# Altium PCB cinch_stereo_ingang.PcbDoc
Units mm, origin at the board's own origin, x right, y up, seen from the top; angles counter-clockwise.
Board outline 65.96 x 77 mm, 2 copper layers (Top Layer, Bottom Layer); 60 components, 162 nets, 148 pads, 8 vias.
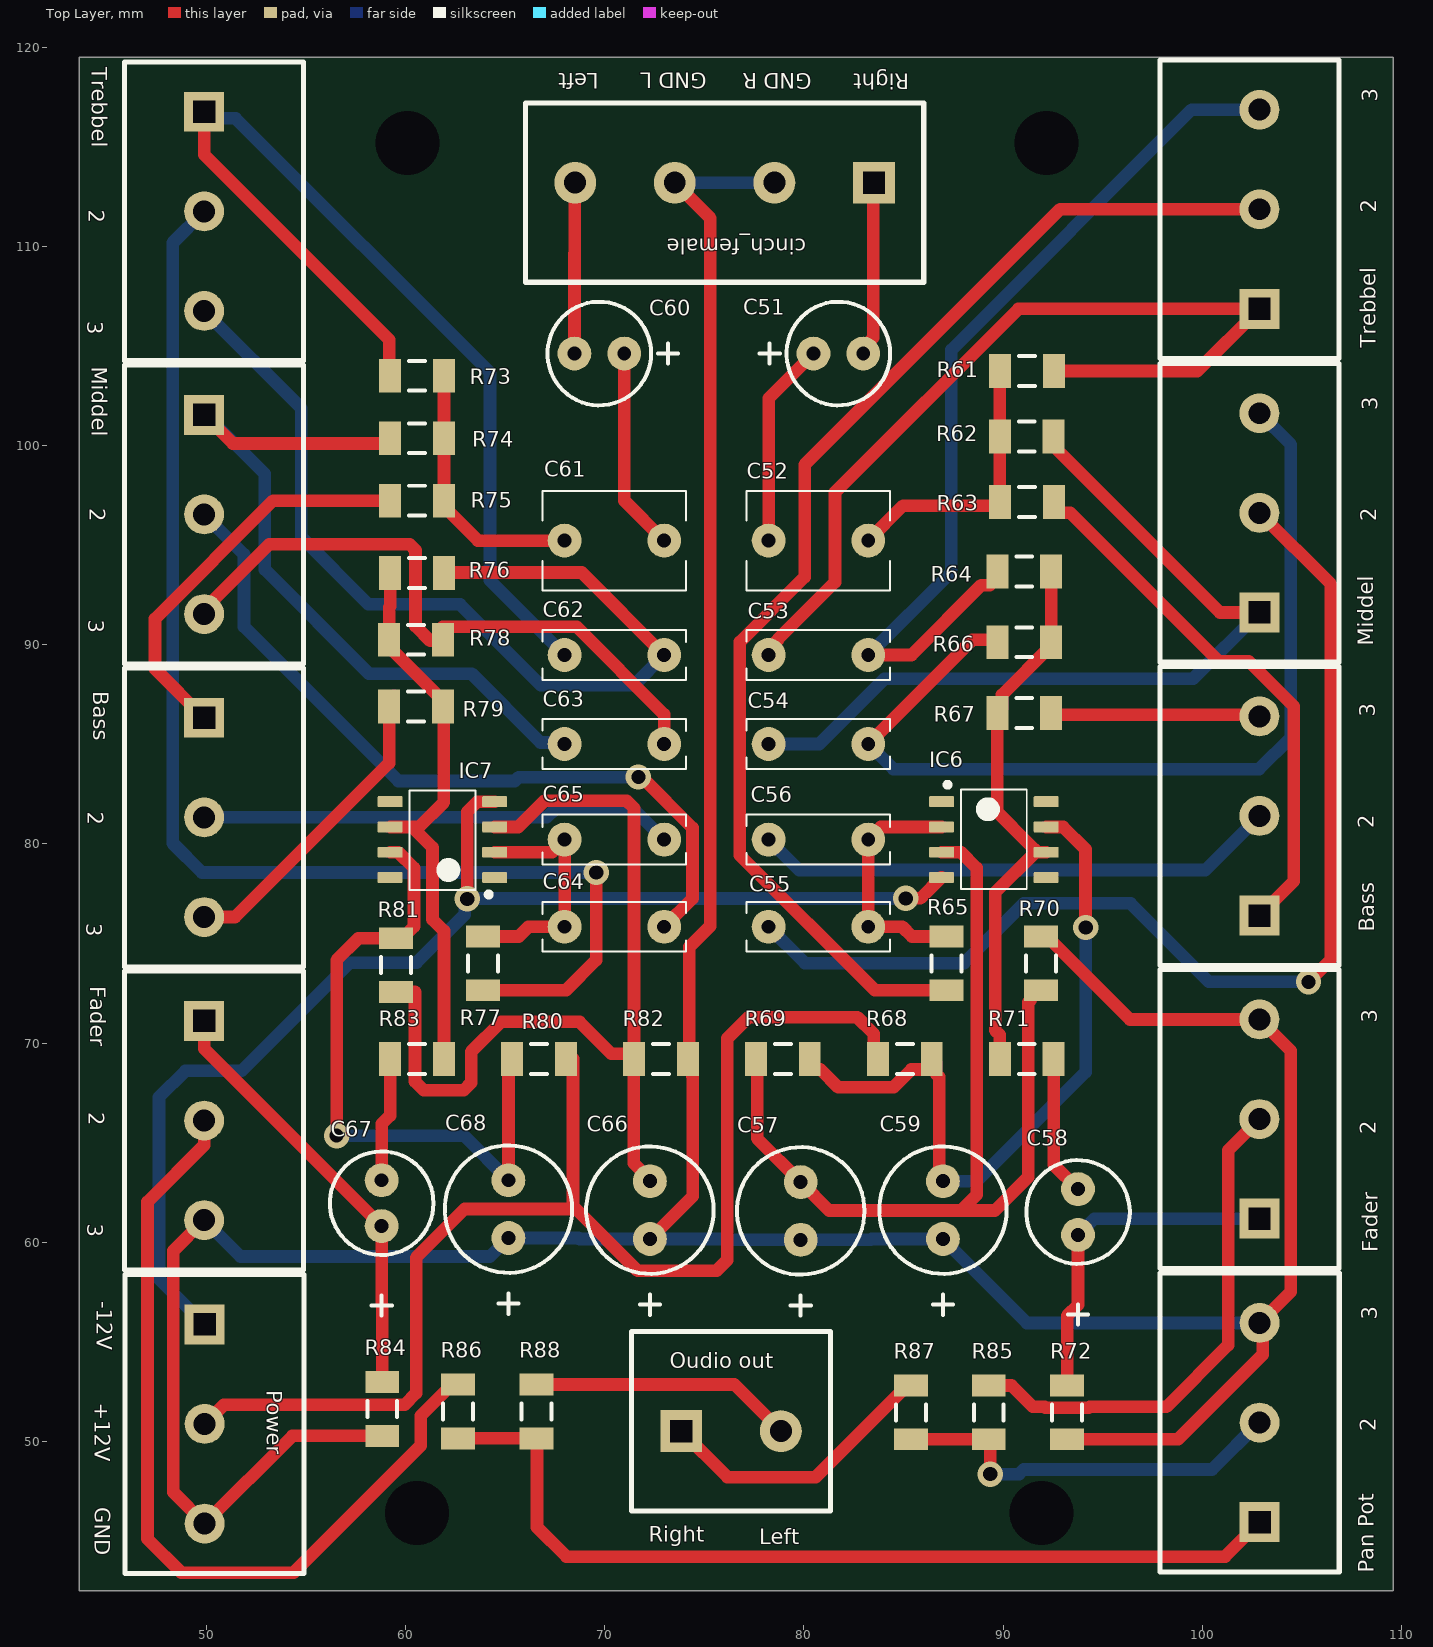
[diagram p0: Top Layer view]
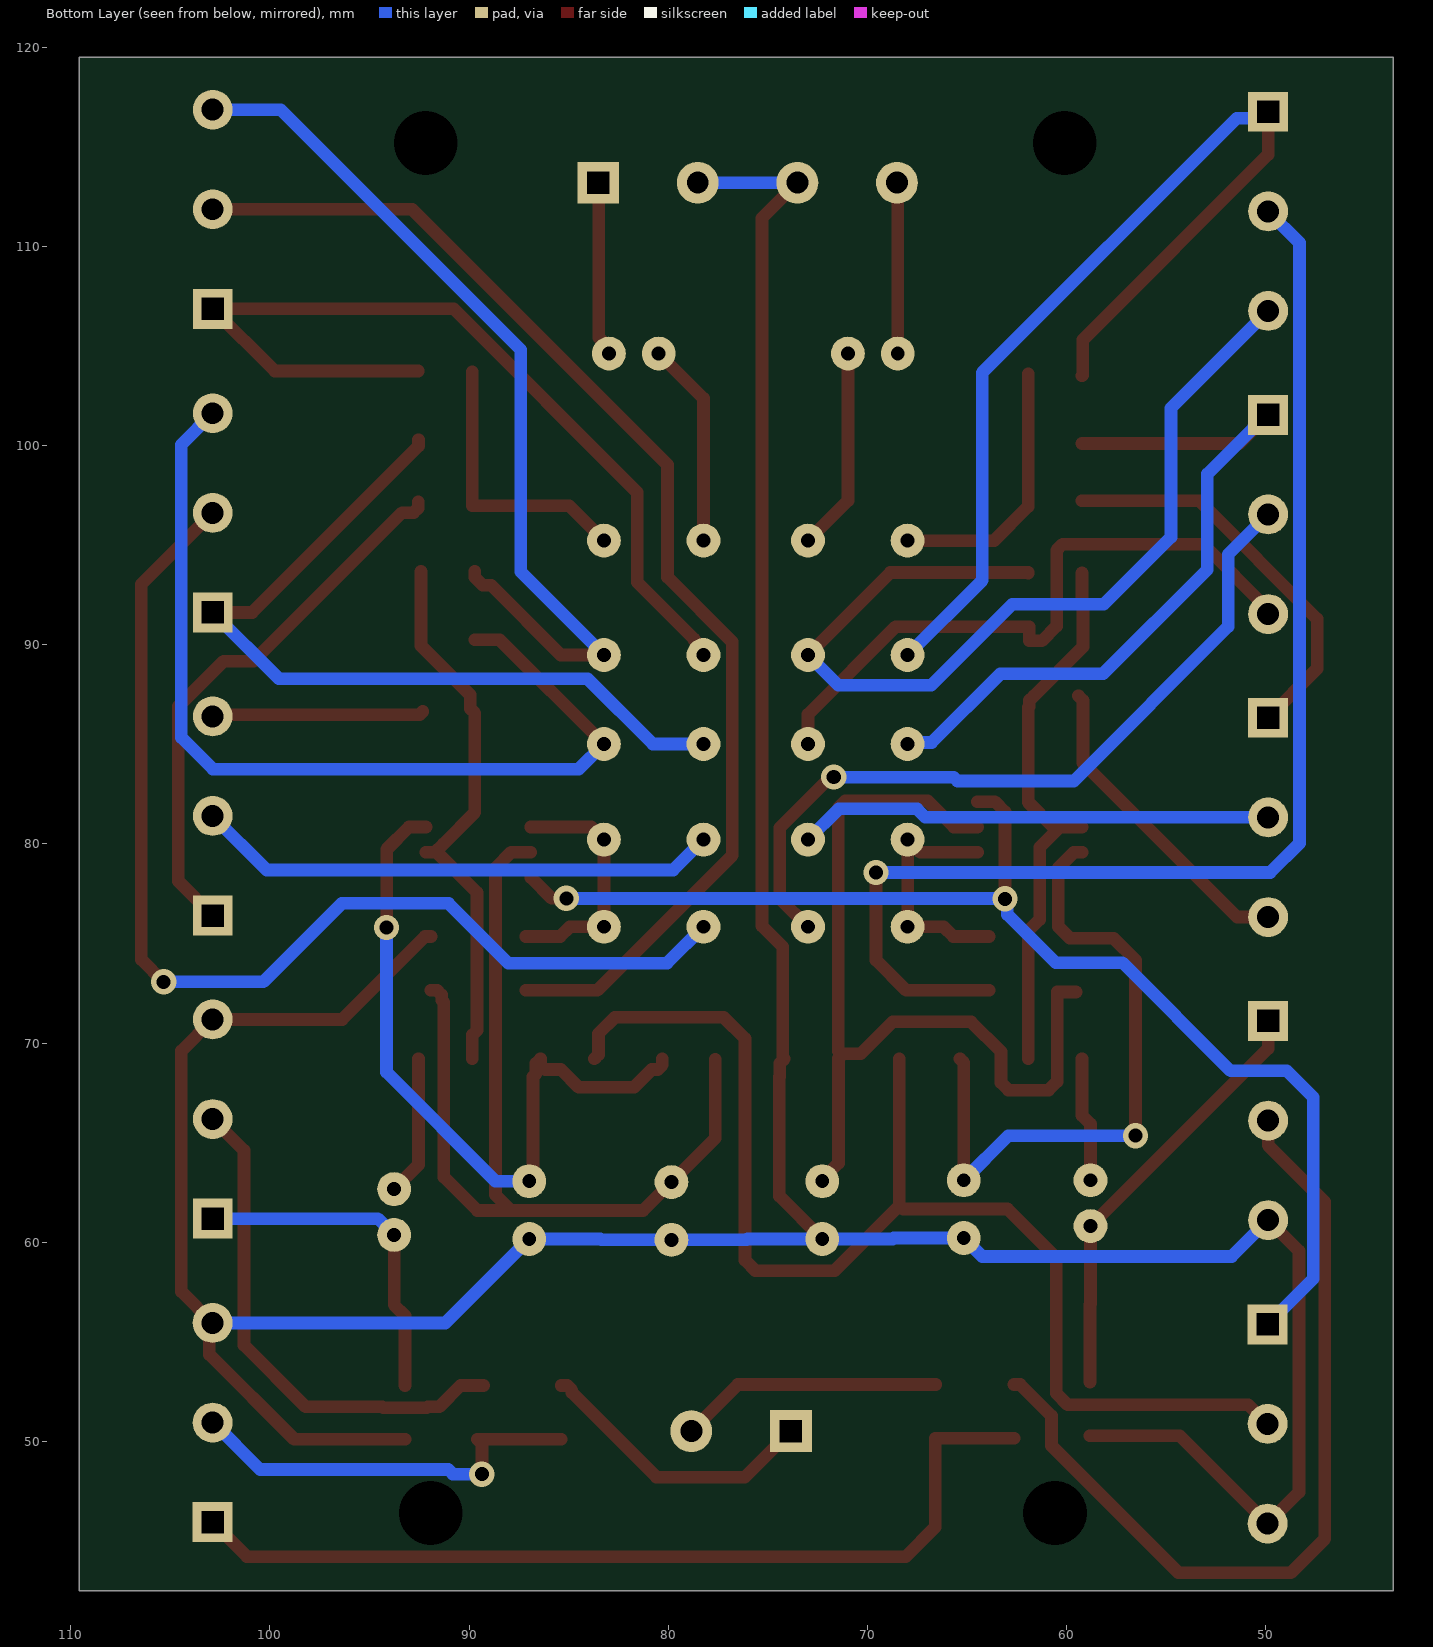
[diagram p1: Bottom Layer view, seen from below]

## Layer stack, top to bottom
Top Solder: solder mask 0.0102, Solder Resist, Dk 3.5
Top Layer: signal copper 0.0356
Dielectric 1: dielectric 0.32, FR-4, Dk 4.8
Bottom Layer: signal copper 0.0356
Bottom Solder: solder mask 0.0102, Solder Resist, Dk 3.5

## Board outline
43.612,42.5 109.576,42.5 109.576,119.5 43.612,119.5

## Design rules (kind name [scope] priority, off if disabled: settings)
Clearance [All] p1: gap=0.254 ignorepadtopadclearanceinfootprint=FALSE except(0: Arc-Hole Track-Hole SMDPad-Hole THPad-Hole Via-Hole Fill-Hole Poly-Hole Region-Hole Text-Hole)
HoleSize [All] p1: absolutevalues=TRUE maxlimit=5.08 minlimit=0.025 maxpercent=80.000 minpercent=20.000
PolygonConnect [All] p1: connectstyle=Relief reliefconductorwidth=0.254 reliefentries=4 polygonreliefangle="90 Angle" airgapwidth=0.254
RoutingVias [All] p1: holewidth=0.711 width=1.27 viastyle="Through Hole" minholewidth=0.711 minwidth=1.27 maxholewidth=0.711 maxwidth=1.27
SolderMaskExpansion [All] p1: expansion=0.102 istentingtop=FALSE
Width [All] p1: maxlimit=1.27 minlimit=0.254 preferedwidth=0.635 minimp=50.000000 maximp=50.000000 favimp=50.000000
29 further rules are at their usual default settings.

## Classes and differential pairs
component class cinch_stereo_ingang: Bass C51 C52 C53 C54 C55 C56 C57 C58 C59 C60 C61 C62 C63 C64 C65 C66 C67 C68 cinch_female Fader IC6 IC7 Middel "Oudio out" "Pan Pot" Power R61 R62 R63 R64 R65 R66 R67 R68 R69 R70 R71 R72 R73 R74 R75 R76 R77 R78 R79 R80 R81 R82 R83 R84 R85 R86 R87 R88 Trebbel

## Components (designator, comment, footprint, x,y, rotation, side; value= is the part's Value field where it differs from the comment)
Bass "RPot" HEADER_3 49.886,86.331 r270 top value=470K (schematic designator P2_3B)
Bass "RPot" HEADER_3 102.87,76.403 r90 top value=470K (schematic designator P2_3A)
C51 "Cap Pol2" "CAPACITOR 10UF" 82.979,104.619 r180 top value=10uF
C52 "Cap" "CAPACITOR 1UF" 78.229,95.229 r0 top value=1uF
C53 "Cap" "CAPACITOR 22NF, 47NF, 100NF" 78.229,89.486 r0 top value=47nF
C54 "Cap" "CAPACITOR 22NF, 47NF, 100NF" 78.229,85.018 r0 top value=4n7F
C55 "Cap" "CAPACITOR 22NF, 47NF, 100NF" 78.229,75.842 r0 top value=22nF
C56 "Cap" "CAPACITOR 22NF, 47NF, 100NF" 78.229,80.217 r0 top value=4n7F
C57 "Cap Pol2" "CAPACITOR 100UF" 79.839,63.024 r270 top value=100uF
C58 "Cap Pol2" "CAPACITOR 4U7F" 93.76,62.671 r270 top value=4u7F
C59 "Cap Pol2" "CAPACITOR 100UF" 86.978,63.067 r270 top value=100uF
C60 "Cap Pol2" "CAPACITOR 10UF" 68.478,104.619 r0 top value=10uF
C61 "Cap" "CAPACITOR 1UF" 72.984,95.229 r180 top value=1uF
C62 "Cap" "CAPACITOR 22NF, 47NF, 100NF" 67.984,89.486 r0 top value=47nF
C63 "Cap" "CAPACITOR 22NF, 47NF, 100NF" 67.984,85.018 r0 top value=4n7F
C64 "Cap" "CAPACITOR 22NF, 47NF, 100NF" 72.984,75.842 r180 top value=22nF
C65 "Cap" "CAPACITOR 22NF, 47NF, 100NF" 72.984,80.217 r180 top value=4n7F
C66 "Cap Pol2" "CAPACITOR 100UF" 72.267,63.067 r270 top value=100uF
C67 "Cap Pol2" "CAPACITOR 4U7F" 58.8,63.115 r270 top value=4u7F
C68 "Cap Pol2" "CAPACITOR 100UF" 65.165,63.115 r270 top value=100uF
cinch_female "cinch_female" HEADER_4 83.516,113.197 r180 top
Fader "RPot" HEADER_3 49.886,71.112 r270 top value=470K (schematic designator P2_4B)
Fader "RPot" HEADER_3 102.87,61.189 r90 top value=470K (schematic designator P2_4A)
IC6 "TL061CD" OPAMP_TL061 89.535,80.217 r0 top
IC7 "TL061CD" OPAMP_TL061 61.849,80.217 r180 top
Middel "RPot" HEADER_3 49.886,101.542 r270 top value=100K (schematic designator P2_2B)
Middel "RPot" HEADER_3 102.87,91.622 r90 top value=100K (schematic designator P2_2A)
"Oudio out" "Header 2" HEADER_2 73.842,50.521 r0 top (schematic designator "PIN 17")
"Pan Pot" "RPot" HEADER_3 102.875,45.95 r90 top value=10K (schematic designator P4)
Power "Header 3" HEADER_3 49.911,55.88 r270 top (schematic designator "PIN 16")
R61 "Res2" C1206 91.201,103.74 r0 top value=12k
R62 "Res2" C1206 91.186,100.452 r0 top value=3k9
R63 "Res2" C1206 91.201,97.164 r0 top value=1k8
R64 "Res2" C1206 91.059,93.679 r0 top value=12k
R65 "Res2" C1206 87.16,74.002 r90 top value=12k
R66 "Res2" C1206 91.059,90.123 r0 top value=3k9
R67 "Res2" C1206 91.059,86.567 r180 top value=1K8
R68 "Res2" C1206 85.065,69.207 r180 top value=220
R69 "Res2" C1206 78.943,69.207 r0 top value=22k
R70 "Res2" C1206 91.91,74.002 r270 top value=22k
R71 "Res2" C1206 91.186,69.207 r0 top value=560
R72 "Res2" C1206 93.215,51.461 r90 top value=100
R73 "Res2" C1206 60.579,103.505 r180 top value=12k
R74 "Res2" C1206 60.579,100.368 r180 top value=3k9
R75 "Res2" C1206 60.579,97.231 r180 top value=1k8
R76 "Res2" C1206 60.579,93.6 r180 top value=12k
R77 "Res2" C1206 63.894,74.002 r90 top value=12k
R78 "Res2" C1206 60.524,90.25 r180 top value=3k9
R79 "Res2" C1206 60.524,86.9 r0 top value=1K8
R80 "Res2" C1206 66.7,69.207 r0 top value=220
R81 "Res2" C1206 59.529,73.914 r90 top value=22k
R82 "Res2" C1206 72.822,69.207 r180 top value=22k
R83 "Res2" C1206 60.579,69.207 r180 top value=560
R84 "Res2" C1206 58.829,51.635 r90 top value=100
R85 "Res2" C1206 89.278,51.461 r270 top value=4k7
R86 "Res2" C1206 62.639,51.508 r270 top value=4k7
R87 "Res2" C1206 85.369,51.461 r90 top value=10K
R88 "Res2" C1206 66.576,51.508 r90 top value=10K
Trebbel "RPot" HEADER_3 49.886,116.756 r270 top value=100K (schematic designator P2_1B)
Trebbel "RPot" HEADER_3 102.87,106.862 r90 top value=100K (schematic designator P2_1A)

## Footprints (in the part's own frame and the unit in brackets; to place one, negate y for a bottom-side part, rotate by r counter-clockwise, add the part's x,y. Pads: shape width x height; smd on the part's side, far side on the other; paste and mask are expansions set on the pad)
C1206 [mm] "Chip Capacitor, Body 3.2x1.6mm, IPC High Density"
  rect 1.1x1.7 smd: 1(-1.35,0) 2(1.35,0)
  silkscreen extent -0.4,-0.75 0.4,0.75, body extent -1.7,-0.9 1.7,0.9, height 1.3
"CAPACITOR 1UF" [mm]
  round 1.7 hole 0.7: 1(0,0) 2(5,0)
  silkscreen extent -1.1,-2.5 6.1,2.5
"CAPACITOR 4U7F" [mm]
  round 1.7 hole 0.7: 1(0,0) 2(2.3,0)
  silkscreen extent -1.45,-2.6 6.8,2.6
"CAPACITOR 10UF" [mm]
  round 1.7 hole 0.7: 1(0,0) 2(2.5,0)
  silkscreen extent -1.35,-2.6 5.21,2.6
"CAPACITOR 22NF, 47NF, 100NF" [mm]
  round 1.7 hole 0.7: 1(0,0) 2(5,0)
  silkscreen extent -1.1,-1.25 6.1,1.25
"CAPACITOR 100UF" [mm]
  round 1.7 hole 0.7: 1(0,0) 2(2.9,0)
  silkscreen extent -1.75,-3.2 6.71,3.2
HEADER_2 [mm]
  rect 2.1x2.1 hole 1.1 square: 1(0,0)
  round 2.1 hole 1.1: 2(5,0)
  silkscreen extent -2.5,-4 7.5,5, body extent -2.65,-4 7.5,4, height 10
HEADER_3 [mm]
  rect 2x2 hole 1.1 square: 1(0,0)
  round 2 hole 1.1: 2(5,0) 3(10,0)
  silkscreen extent -2.5,-4 12.5,5, body extent -2.65,-4 12.5,4, height 10
HEADER_4 [mm]
  rect 2.1x2.1 hole 1.1 square: 1(0,0)
  round 2.1 hole 1.1: 2(5,0) 3(10,0) 4(15,0)
  silkscreen extent -2.5,-4 17.5,5, body extent -2.67,-4 17.49,4, height 10
OPAMP_TL061 [mm] "SOIC, 8-Leads, Body 5x4mm, Pitch 1.27mm, IPC High Density"
  rrect18% 1.25x0.55 smd: 1(-2.625,1.905) 2(-2.625,0.635) 3(-2.625,-0.635) 4(-2.625,-1.905) 5(2.625,-1.905) 6(2.625,-0.635) 7(2.625,0.635) 8(2.625,1.905)
  silkscreen extent -2.45,-2.48 1.65,2.88, body extent -3,-2.45 3,2.45, height 1.63

## Part data
Bass Bass Fader Fader: library part RPot_1, "Potentiometer", LatestRevisionDate=17-Jul-2002, LatestRevisionNote="Re-released for DXP Platform.", PackageDescription="Variable Resistor, Thru-Hole; 3 Leads", PackageReference=VR5, Published=8-Jun-2000, Publisher="Altium Limited", Set Position=0.5, Sim Note="Enter the Resistance value and the set point into parameter fields."
C51 C57 C58 C59 C60 C66 C67 C68: "electrolytic", LatestRevisionDate=17-Jul-2002, LatestRevisionNote="Re-released for DXP Platform.", PackageDescription="Polarized Capacitor; 2 Leads", PackageReference=POLAR0.8, Published=8-Jun-2000, Publisher="Altium Limited"
C52 C53 C54 C55 C56 C61 C62 C63 C64 C65: "Capacitor", LatestRevisionDate=17-Jul-2002, LatestRevisionNote="Re-released for DXP Platform.", PackageDescription="Radial Cap, Thru-Hole; 2 Leads; 0.3 in Pin Spacing", PackageReference=RAD-0.3, Published=8-Jun-2000, Publisher="Altium Limited"
IC6 IC7: library part opamp_TL061, "Low-Power JFET-Input General-Purpose Operational Amplifier, 7 to 36 V, 0 to 70 degC, 8-pin SOIC (D8), Green (RoHS & no Sb/Br)", Manufacturer="Texas Instruments", Rating=Military, Total Supply Voltage(Max)(+5V is 5, +/-5V is 10)=36, Total Supply Voltage(Min)(+5V is 5, +/-5V is 10)=7, CMRR(Min)(dB)=70, Code_JEDEC=MS-012, ComponentLink1Description="Manufacturer URL", ComponentLink1URL=http://www.ti.com/, ComponentLink2Description=Datasheet, ComponentLink2URL=http://www.ti.com/lit/ds/symlink/tl061.pdf, ComponentLink3Description="Package Specification", ComponentLink3URL=http://www.ti.com/litv/pdf/msoi002j, DatasheetVersion=SLOS078J, Eco-Plan="Green (RoHS & no Sb/Br)", GBW(Typ)(MHz)=1, IIB(Max)(pA)=400, Iq per channel(Max)(mA)=0.25, Mounting Technology="Surface Mount", Number of Channels=1, Offset Drift(Typ)(uV/C)=10, PackageDescription="8-Pin Plastic Small Outline, Body 4.9 x 3.9 mm, Pitch 1.27 mm", PackageReference=D0008A, PackageVersion="4040047-3/M, 06/2011", PartNumber=TL061CD, Slew Rate(Typ)(V/us)=3.5, Sub Family="General Purpose Amplifier, High Supply Voltage Amplifier (>=30V), Low Power Amp (<=500uA)", Vio (25C)(Max)(mV)=15, Vn at 1kHz(Typ)(nV/rtHz)=42
Middel Middel "Pan Pot" Trebbel Trebbel: "Potentiometer", LatestRevisionDate=17-Jul-2002, LatestRevisionNote="Re-released for DXP Platform.", PackageDescription="Variable Resistor, Thru-Hole; 3 Leads", PackageReference=VR5, Published=8-Jun-2000, Publisher="Altium Limited", Set Position=0.5, Sim Note="Enter the Resistance value and the set point into parameter fields."
"Oudio out": "Header, 2-Pin", LatestRevisionDate=17-Jul-2002, LatestRevisionNote="Re-released for DXP Platform.", Publisher="Altium Limited"
Power: "Header, 3-Pin", LatestRevisionDate=17-Jul-2002, LatestRevisionNote="Re-released for DXP Platform.", Publisher="Altium Limited"
R61 R62 R63 R64 R65 R66 R67 R68 R69 R70 R71 R72 R73 R74 R75 R76 R77 R78 R79 R80 R81 R82 R83 R84: "Resistor", LatestRevisionDate=17-Jul-2002, LatestRevisionNote="Re-released for DXP Platform.", PackageDescription="Axial Device, Thru-Hole; 2 Leads; 0.4 in Pin Spacing", PackageReference=AXIAL-0.4, Published=8-Jun-2000, Publisher="Altium Limited"
R85 R86: library part Res2_13, "Resistor", LatestRevisionDate=17-Jul-2002, LatestRevisionNote="Re-released for DXP Platform.", PackageDescription="Axial Device, Thru-Hole; 2 Leads; 0.4 in Pin Spacing", PackageReference=AXIAL-0.4, Published=8-Jun-2000, Publisher="Altium Limited"
R87 R88: library part Res2_3, "Resistor", LatestRevisionDate=17-Jul-2002, LatestRevisionNote="Re-released for DXP Platform.", PackageDescription="Axial Device, Thru-Hole; 2 Leads; 0.4 in Pin Spacing", PackageReference=AXIAL-0.4, Published=8-Jun-2000, Publisher="Altium Limited"

## Free pads (board coordinates)
  round 1.524 hole 3.2 unplated: 21(60.579,46.406) 23(91.923,46.406) 24(92.177,115.189) 25(60.096,115.189)

## Via types
v1: diameter 1.27, hole 0.711, Top Layer to Bottom Layer, 8 vias

## Nets (pads, with @x,y where several pads share a name; then routed paths per layer and width w, separated by ;. In a path a pad name is that pad's centre, name@x,y a point inside that pad or via, vN(x,y) a via of type N, cw(c..) or ccw(c..) an arc to the next point about the centre after c; other vN are vias at no path point)
GND: "Pan Pot.3" C57.2 C59.2 C66.2 C68.2 cinch_female.2 cinch_female.3 Fader.3 Power.3 R70.1 R72.1 R82.1 R84.1 | length 185.9
  Top Layer w0.635: Fader.3@49.886,61.112 48.336,59.563 48.336,47.455 Power.3 54.316,50.285 R84.1 ; C66.2 74.422,62.322 74.422,68.303 74.404,68.32 74.404,68.975 R82.1 74.244,69.28 74.244,74.828 75.294,75.879 75.294,111.419 cinch_female.3 ; R70.1 92.21,75.352 96.373,71.189 102.87,71.189 104.445,69.614 104.445,57.52 102.875,55.95 103.036,55.789 103.036,54.369 98.778,50.111 R72.1
  Bottom Layer w0.635: Fader.3@49.886,61.112 51.714,59.284 64.233,59.284 C68.2 68.682,60.215 68.73,60.167 C66.2 76.022,60.167 76.065,60.124 C57.2 83.363,60.124 83.405,60.167 C59.2 91.195,55.95 102.875,55.95 ; cinch_female.3 cinch_female.2
GND_Chasie: 
Net_1: 
Net_3: 
NetC1_1: 
NetC1_2: 
NetC2_1: 
NetC2_2: 
NetC3_1: 
NetC4_1: 
NetC4_2: 
NetC5_1: 
NetC21_2: 
NetC22_1: 
NetC22_2: 
NetC23_1: 
NetC23_2: 
NetC24_1: 
NetC24_2: 
NetC25_1: 
NetC26_1: 
NetC27_1: 
NetC27_2: 
NetC28_1: 
NetC31_1: 
NetC31_2: 
NetC34_1: 
NetC34_2: 
NetC35_1: 
NetC35_2: 
NetC36_2: 
NetC40_1: 
NetC40_2: 
NetC43_1: 
NetC43_2: 
NetC44_1: 
NetC44_2: 
NetC45_2: 
NetC51_1: C51.1 cinch_female.1 | length 8.8
  Top Layer w0.635: C51.1@82.979,104.619 82.979,104.907 83.486,105.414 cinch_female.1@83.486,113.197
NetC51_2: C51.2 C52.1 | length 10.3
  Top Layer w0.635: C52.1 78.228,102.369 C51.2@80.479,104.619
NetC52_2: C52.2 R61.1 R62.1 R63.1 | length 14.1
  Top Layer w0.635: C52.2 84.981,96.981 89.836,96.981 89.836,100.283 R61.1@89.836,103.712
NetC53_1: C53.1 R61.2 Trebbel.1@102.87,106.862 | length 46.3
  Top Layer w0.635: C53.1 78.229,89.774 78.706,90.251 78.706,90.288 81.559,93.142 81.559,97.656 90.765,106.862 102.87,106.862 99.748,103.74 R61.2
NetC53_2: C53.2 R64.1 Trebbel.3@102.87,116.862 | length 45.9
  Top Layer w0.635: C53.2 85.397,89.486 88.9,92.989 89.319,92.989 89.709,93.379 R64.1
  Bottom Layer w0.635: C53.2 87.401,93.659 87.401,104.8 99.463,116.862 Trebbel.3@102.87,116.862
NetC54_1: C54.1 Middel.1@102.87,91.622 R62.2 | length 41.5
  Top Layer w0.635: R62.2@92.536,100.283 92.536,99.974 100.889,91.622 Middel.1@102.87,91.622
  Bottom Layer w0.635: C54.1@78.229,85.018 80.77,85.018 84.043,88.29 99.539,88.29 Middel.1@102.87,91.622
NetC54_2: C54.2 Middel.3@102.87,101.622 R66.1 | length 48
  Top Layer w0.635: C54.2@83.229,85.018 88.461,90.25 R66.1@89.709,90.25
  Bottom Layer w0.635: C54.2@83.229,85.018 84.492,83.754 102.855,83.754 104.445,85.344 104.445,100.047 Middel.3@102.87,101.622
NetC55_1: C55.1 Middel.2@102.87,96.622 | length 56.2
  Top Layer w0.635: Middel.2@102.87,96.622 106.451,93.04 106.451,74.193 v1(105.334,73.076)
  Bottom Layer w0.635: C55.1 80.055,74.016 88.036,74.016 91.034,77.013 96.393,77.013 100.33,73.076 v1(105.334,73.076)
NetC55_2: C55.2 C56.2 IC6.2 R65.2 | length 12.5
  Top Layer w0.635: IC6.2@86.91,80.852 83.864,80.852 83.229,80.217 83.229,78.029 C55.2 84.938,75.842 85.428,75.352 R65.2
NetC56_1: Bass.2@102.87,81.403 C56.1 | length 26.4
  Bottom Layer w0.635: C56.1@78.229,80.217 79.756,78.689 100.156,78.689 Bass.2@102.87,81.403
NetC57_1: C57.1 IC6.3 R69.1 R70.2 | length 49.2
  Top Layer w0.635: R69.1@77.648,69.19 77.648,65.215 C57.1 81.268,61.595 87.884,61.595 ; IC6.3@86.91,79.582 87.884,79.582 88.671,78.795 88.671,62.382 87.884,61.595 ; R70.2 91.61,72.652 91.378,72.419 91.378,72.162 91.262,72.047 91.262,63.271 89.586,61.595 87.884,61.595
NetC58_1: C58.1 R71.2 | length 7
  Top Layer w0.635: R71.2 92.536,63.894 C58.1@93.76,62.671
NetC58_2: C58.2 Fader.1@102.87,61.189 R72.2 | length 17.2
  Top Layer w0.635: R72.2 93.215,56.312 93.76,56.856 C58.2
  Bottom Layer w0.635: C58.2 94.578,61.189 Fader.1@102.87,61.189
NetC59_1: C59.1 IC6.7 R68.1 R69.2 | length 37.1
  Top Layer w0.635: R69.2 80.293,68.907 80.526,68.675 80.826,68.675 81.715,67.786 84.501,67.786 85.39,68.675 86.182,68.675 86.415,68.907 R68.1 86.647,68.975 86.647,68.447 86.792,68.303 86.792,63.253 C59.1 ; IC6.7@92.16,80.852 92.164,80.848 93.015,80.848 94.132,79.731 94.132,75.819 v1(94.145,75.806)
  Bottom Layer w0.635: C59.1 88.67,63.067 94.145,68.542 v1(94.145,75.806)
NetC60_1: C60.1 cinch_female.4 | length 8.6
  Top Layer w0.635: C60.1@68.478,104.619 68.478,109.626 68.486,109.634 cinch_female.4@68.486,113.197
NetC60_2: C60.2 C61.1 | length 10.2
  Top Layer w0.635: C60.2@70.978,104.619 70.978,97.234 C61.1
NetC61_2: C61.2 R73.1 R74.1 R75.1 | length 13.4
  Top Layer w0.635: R73.1@61.929,103.6 61.929,100.1 R75.1 61.929,96.931 63.632,95.229 C61.2
NetC62_1: C62.1 R73.2 Trebbel.1@49.886,116.756 | length 52.6
  Top Layer w0.635: Trebbel.1@49.886,116.756 49.886,114.611 59.189,105.308 59.189,103.545 R73.2
  Bottom Layer w0.635: Trebbel.1@49.886,116.756 50.214,116.428 51.466,116.428 64.237,103.657 64.237,93.233 C62.1
NetC62_2: C62.2 R76.1 Trebbel.3@49.886,106.756 | length 48.1
  Top Layer w0.635: R76.1 61.929,93.624 68.846,93.624 C62.2
  Bottom Layer w0.635: Trebbel.3@49.886,106.756 54.762,101.879 54.762,95.402 58.141,92.024 62.738,92.024 66.802,87.96 71.458,87.96 C62.2
NetC63_1: C63.1 Middel.1@49.886,101.542 R74.2 | length 37.7
  Top Layer w0.635: Middel.1@49.886,101.542 51.327,100.1 R74.2@59.229,100.1
  Bottom Layer w0.635: Middel.1@49.886,101.542 50.568,100.859 50.652,100.859 52.934,98.577 52.934,93.777 58.166,88.544 63.322,88.544 66.777,85.09 67.912,85.09 C63.1@67.984,85.018
NetC63_2: C63.2 Middel.3@49.886,91.542 R78.1 | length 32.9
  Top Layer w0.635: Middel.3@49.886,91.542 49.886,91.77 53.162,95.047 60.198,95.047 60.503,94.742 60.503,90.932 61.239,90.195 61.874,90.195 61.874,90.2 61.874,90.908 68.58,90.908 72.984,86.504 C63.2@72.984,85.018
NetC64_1: C64.1 Middel.2@49.886,96.542 | length 38.9
  Top Layer w0.635: v1(71.689,83.356) 71.856,83.356 74.405,80.806 74.405,77.263 C64.1
  Bottom Layer w0.635: Middel.2@49.886,96.542 51.892,94.535 51.892,90.907 59.639,83.16 65.48,83.16 65.676,83.356 v1(71.689,83.356)
NetC64_2: C64.2 C65.2 IC7.2 R77.2 | length 12.4
  Top Layer w0.635: R77.2 65.684,75.352 66.175,75.842 C64.2 67.984,78.029 67.984,80.217 67.349,79.582 IC7.2@64.474,79.582
NetC65_1: Bass.2@49.886,81.331 C65.1 | length 23.9
  Bottom Layer w0.635: Bass.2@49.886,81.331 67.081,81.331 67.513,81.763 71.438,81.763 C65.1@72.984,80.217
NetC66_1: C66.1 IC7.3 R81.1 R82.2 | length 46.1
  Top Layer w0.635: R81.1 60.477,72.564 60.477,68.072 60.909,67.64 62.925,67.64 63.297,68.012 63.297,69.571 64.795,71.069 68.732,71.069 70.341,69.46 71.239,69.46 71.472,69.228 R82.2 71.45,69.186 71.45,68.961 71.45,63.971 72.267,63.155 C66.1 ; IC7.3@64.474,80.852 65.659,80.852 66.976,82.169 71.1,82.169 71.472,81.797 R82.2@71.472,69.596
NetC67_1: C67.1 R83.2 | length 6.3
  Top Layer w0.635: C67.1 58.8,65.938 59.229,66.367 R83.2
NetC67_2: C67.2 Fader.1@49.886,71.112 R84.2 | length 21.8
  Top Layer w0.635: Fader.1@49.886,71.112 49.886,69.73 C67.2 58.8,56.899 58.829,56.871 R84.2
NetC68_1: C68.1 IC7.7 R80.1 R81.2 | length 33.6
  Top Layer w0.635: v1(56.54,65.354) 56.54,74.168 57.636,75.264 59.829,75.264 60.421,75.856 60.421,78.795 59.633,79.582 IC7.7@59.224,79.582 ; C68.1 65.165,69.021 R80.1
  Bottom Layer w0.635: v1(56.54,65.354) 62.926,65.354 C68.1
NetC71_1: 
NetC72_2: 
NetC81_1: 
NetC81_2: 
NetC83_1: 
NetC83_2: 
NetD1_2: 
NetD3_2: 
NetD5_1: 
NetD7_2: 
NetD8_2: 
NetD9_2: 
NetD10_2: 
NetD11_1: 
NetD12_2: 
NetD14_2: 
NetD15_2: 
NetD16_2: 
NetD17_2: 
NetF1_1: 
NetF1_2: 
NetIC1_1: 
NetIC1_2: 
NetIC1_6: 
NetIC1_7: 
NetIC2_2: 
NetIC2_3: 
NetIC2_6: 
NetIC3_6: 
NetIC4_1: 
NetIC4_2: 
NetIC4_6: 
NetIC4_7: 
NetIC5_5: 
NetIC6_6: IC6.6 R64.2 R66.2 R67.2 R71.1 | length 27.8
  Top Layer w0.635: R71.1 89.836,70.404 89.599,70.641 89.599,77.56 IC6.6@91.622,79.582 ; IC6.6@92.16,79.582 91.716,79.582 91.292,80.006 89.709,81.589 R67.2 89.941,86.799 89.941,87.482 92.409,89.95 92.409,90.25 R64.2
NetIC7_6: IC7.6 R76.2 R78.2 R79.2 R83.1 | length 28.2
  Top Layer w0.635: IC7.6@59.224,80.852 60.325,80.852 ; R76.2 59.229,91.927 59.174,91.872 59.174,90.2 59.174,89.9 61.642,87.432 61.874,87.2 R79.2 61.925,86.849 61.925,82.093 60.684,80.852 60.325,80.852 ; R83.1 61.929,75.633 61.354,76.208 61.354,79.823 60.325,80.852
NetIC8_1: 
NetIC8_2: 
NetIC8_6: 
NetIC8_7: 
NetIC9_5: 
NetIC11_1: 
NetIC11_2: 
NetIC11_4: 
NetIC11_5: 
NetIC11_7: 
NetIC11_9: 
NetIC11_11: 
NetIC11_13: 
NetIC11_14: 
NetIC12_1: 
NetIC12_2: 
NetIC12_4: 
NetIC12_5: 
NetIC12_7: 
NetIC12_9: 
NetIC12_11: 
NetIC12_13: 
NetIC12_14: 
NetP1_2: 
NetP2_1A_2: R65.1 Trebbel.2@102.87,111.862 | length 62.3
  Top Layer w0.635: R65.1 83.558,72.652 76.784,79.426 76.784,90.145 80.035,93.396 80.035,99.035 92.862,111.862 Trebbel.2@102.87,111.862
NetP2_1B_2: R77.1 Trebbel.2@49.886,111.756 | length 64.9
  Top Layer w0.635: R77.1 68.054,72.652 69.571,74.168 v1(69.571,78.562)
  Bottom Layer w0.635: Trebbel.2@49.886,111.756 48.311,110.181 48.311,80.035 49.784,78.562 v1(69.571,78.562)
NetP2_3A_1: Bass.1@102.87,76.403 R63.2 | length 27.7
  Top Layer w0.635: R63.2 92.551,96.864 92.784,96.632 93.36,96.632 100.813,89.179 102.316,89.179 104.597,86.898 104.597,78.13 Bass.1@102.87,76.403
NetP2_3A_3: Bass.3@102.87,86.403 R67.1 | length 10.7
  Top Layer w0.635: R67.1@92.331,86.645 R67.1 92.491,86.485 102.788,86.485 Bass.3@102.87,86.403
  Bottom Layer w0.635: Bass.3@102.862,86.411 Bass.3@102.87,86.403
NetP2_3B_1: Bass.1@49.886,86.331 R75.2 | length 20.3
  Top Layer w0.635: Bass.1@49.886,86.331 47.422,88.795 47.422,91.3 53.353,97.231 R75.2
NetP2_3B_3: Bass.3@49.886,76.331 R79.1 | length 16
  Top Layer w0.635: Bass.3@49.886,76.331 51.439,76.331 59.174,84.066 R79.1 59.174,87.2 R79.1@59.406,87.432
NetP2_4A_2: Fader.2@102.87,66.189 R85.1 | length 25.8
  Top Layer w0.635: R85.1 90.424,52.811 91.495,51.74 92.078,51.74 92.128,51.69 94.302,51.69 94.352,51.74 98.196,51.74 101.295,54.839 101.295,64.614 Fader.2@102.87,66.189
NetP2_4B_2: Fader.2@49.886,66.112 R86.1 | length 43.3
  Top Layer w0.635: Fader.2@49.886,66.112 49.886,64.872 47.041,62.027 47.041,45.11 48.743,43.409 54.381,43.409 60.757,49.784 60.757,51.283 62.332,52.858 R86.1
NetP4_1: "Pan Pot.1" R86.2 R88.1 | length 46
  Top Layer w0.635: R86.2 R88.1 66.599,50.158 66.599,45.695 68.072,44.221 101.146,44.221 102.875,45.95
NetP4_2: "Pan Pot.2" R85.2 R87.1 | length 20.7
  Top Layer w0.635: R87.1 87.3,50.111 89.578,50.111 89.349,49.882 89.349,48.369 v1(89.357,48.362)
  Bottom Layer w0.635: v1(89.357,48.362) 90.807,48.362 91.036,48.59 100.485,48.59 102.86,50.965 102.875,50.95
NetP5_2: 
NetP6_1: 
NetP6_3: 
NetP8_1: 
NetP8_3: 
NetP13_1: 
"NetPIN 14_1": 
"NetPIN 14_2": 
"NetPIN 14_3": 
"NetPIN 14_4": 
"NetPIN 14_5": 
"NetPIN 14_6": 
"NetPIN 15_1": 
"NetPIN 15_2": 
"NetPIN 15_3": 
"NetPIN 15_4": 
"NetPIN 15_5": 
"NetPIN 15_6": 
"NetPIN 17_1": "Oudio out.1" R87.2 | length 14.5
  Top Layer w0.635: 73.842,50.521 76.153,48.209 80.594,48.209 84.837,52.452 84.837,52.579 85.069,52.811 R87.2
"NetPIN 17_2": "Oudio out.2" R88.2 | length 13.2
  Top Layer w0.635: R88.2 76.504,52.858 78.842,50.521
"NetPIN 19_1": 
"NetPIN 19_2": 
NetR58_2: 
NetR105_2: 
VCC: Power.2 R68.2 R80.2 | length 64.4
  Top Layer w0.635: Power.2@49.911,50.88 50.872,51.841 59.944,51.841 60.528,52.426 60.528,59.233 62.967,61.671 68.199,61.671 68.406,61.878 ; R80.2@68.406,69.207 68.406,61.878 ; R68.2 83.503,69.419 83.503,70.472 82.677,71.298 77.216,71.298 76.149,70.231 76.149,59.106 75.616,58.572 71.653,58.572 68.406,61.82 68.406,61.878
VEE: IC6.4 IC7.4 Power.1 | length 62.5
  Top Layer w0.635: v1(63.094,77.241) 63.094,81.61 63.605,82.122 IC7.4@64.474,82.122 ; v1(85.115,77.267) 85.848,77.267 86.893,78.312 IC6.4@86.91,78.312
  Bottom Layer w0.635: Power.1 47.625,58.166 47.625,67.285 48.946,68.605 51.765,68.605 57.201,74.041 60.554,74.041 62.972,76.459 62.972,77.12 v1(63.094,77.241) ; v1@63.115,77.263 85.112,77.263 v1(85.115,77.267)
pads on no net: IC6.1 IC6.5 IC6.8 IC7.1 IC7.5 IC7.8

## Silkscreen, mask and mechanical layers (free items; w line width, h text height)
Top Overlay:
  text "GND L" at 75.133,118.72 h0.76 r180
  text "Left" at 69.71,118.694 h0.76 r180
  text "GND R" at 80.39,118.694 h0.76 r180
  text "Right" at 85.28,118.669 h0.76 r180
  text "3" at 108.814,117.272 h0.76 r90
  text "2" at 44.094,111.836 h0.76 r270
  text "2" at 108.737,111.684 h0.76 r90
  text "3" at 44.018,106.248 h0.76 r270
  text "3" at 108.814,101.778 h0.76 r90
  text "2" at 44.145,96.85 h0.76 r270
  text "2" at 108.737,96.19 h0.76 r90
  text "3" at 44.069,91.262 h0.76 r270
  text "3" at 108.687,86.385 h0.76 r90
  text "2" at 44.044,81.61 h0.76 r270
  text "2" at 108.61,80.797 h0.76 r90
  text "3" at 43.967,76.022 h0.76 r270
  text "3" at 108.788,71.018 h0.76 r90
  text "2" at 44.094,66.523 h0.76 r270
  text "2" at 108.712,65.43 h0.76 r90
  text "3" at 44.018,60.935 h0.76 r270
  text "-12V" at 44.501,57.035 h0.76 r270
  text "3" at 108.788,56.109 h0.76 r90
  text "+12V" at 44.399,51.955 h0.76 r270
  text "2" at 108.712,50.521 h0.76 r90
  text "GND" at 44.399,46.71 h0.76 r270
  text "Right" at 72.2,44.958 h0.76
  text "Left" at 77.762,44.831 h0.76